# Altium PCB 显示板V1.0_ZM_20210706.PcbDoc
Units mm, origin at the board's own origin, x right, y up, seen from the top; angles counter-clockwise.
Board outline 12 x 48.5 mm, 2 copper layers (Top Layer, Bottom Layer); 22 components, 33 nets, 87 pads, 62 vias.
Unrouted connection lines stored in the file: 4.
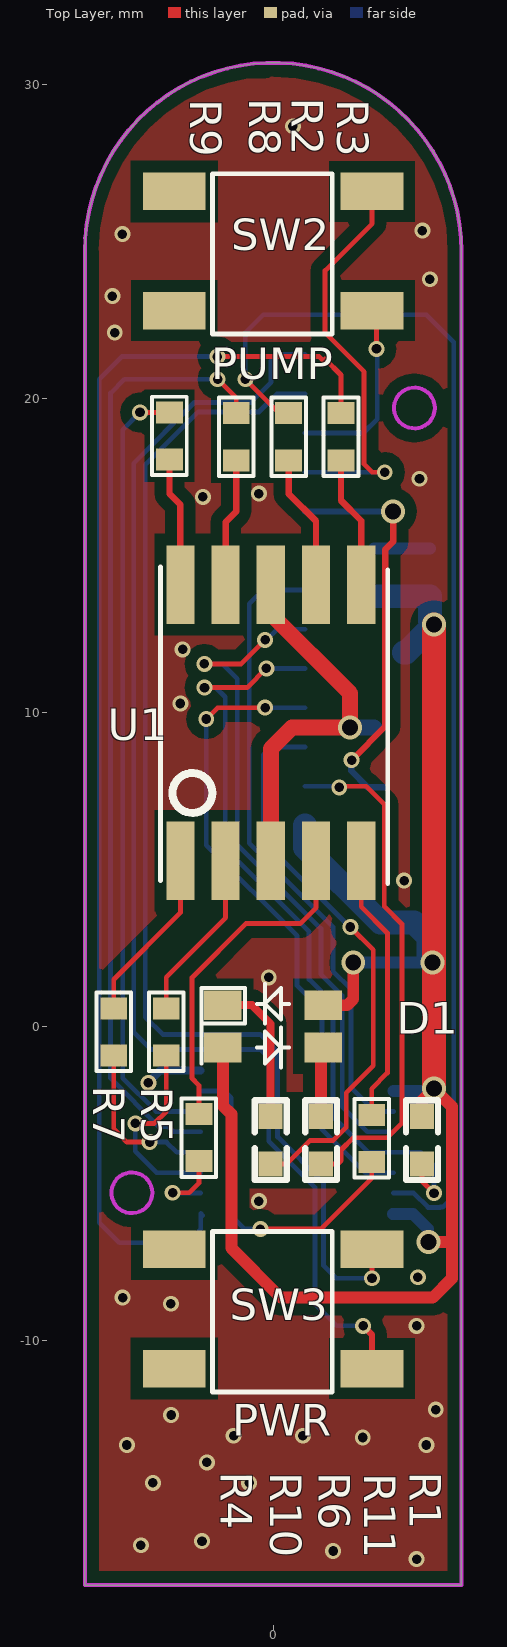
[diagram p0: Top Layer view]
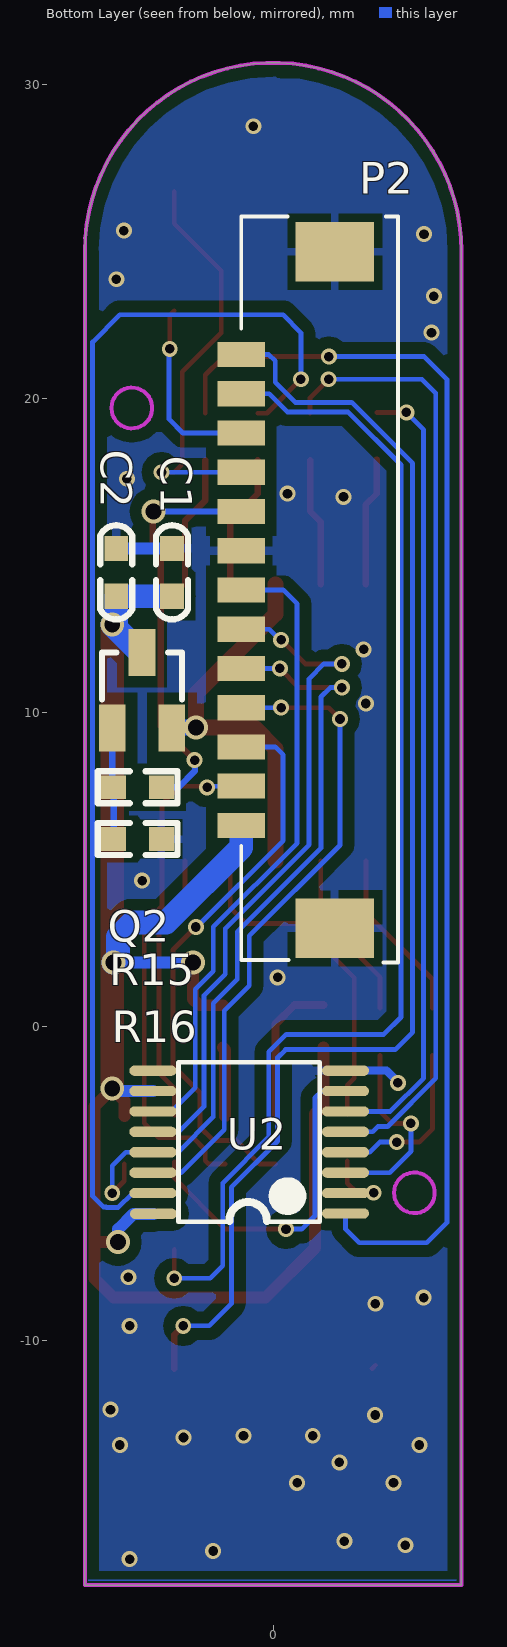
[diagram p1: Bottom Layer view, seen from below]
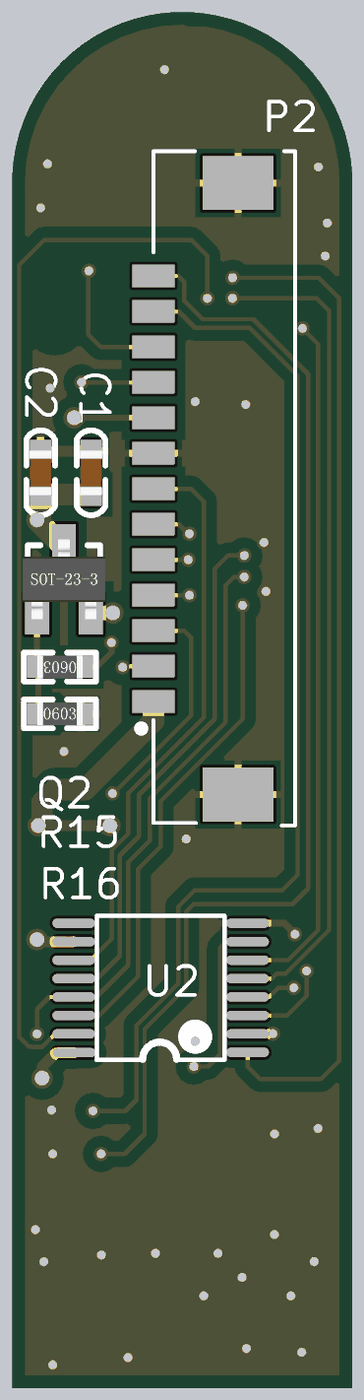
[diagram p2: 3D render of the assembled board from below, using the file's embedded part models]

## Layer stack, top to bottom
Top Solder: solder mask 0.0102, Solder Resist, Dk 3.5
Top Layer: signal copper 0.0356
Dielectric1: dielectric 0.32, FR-4, Dk 4.8
Bottom Layer: signal copper 0.0356
Bottom Solder: solder mask 0.0102, Solder Resist, Dk 3.5

## Board outline
-6,-17.8 -6,24.7 cw(c0,24.7) 6,24.7 6,-17.8

## Design rules (kind name [scope] priority, off if disabled: settings)
Clearance Clearance_1 [InPolygon] p1: gap=0.381
Clearance [All] p2: gap=0.127
MinimumSolderMaskSliver [All] p1: minsoldermaskwidth=0.127
PolygonConnect PolygonConnect_1 [IsVia] p1: connectstyle=Direct reliefconductorwidth=0.254 reliefentries=4 polygonreliefangle="90 Angle" airgapwidth=0.254
PolygonConnect [All] p2: connectstyle=Relief reliefconductorwidth=0.254 reliefentries=4 polygonreliefangle="90 Angle" airgapwidth=0.254
RoutingVias [All] p1: holewidth=0.711 width=1.27 viastyle="Through Hole" minholewidth=0.711 minwidth=1.27 maxholewidth=0.711 maxwidth=1.27
SilkToSolderMaskClearance [IsPad] p1: minsilkscreentomaskgap=0.025 clearancetoexposedcopper=TRUE
SolderMaskExpansion [All] p1: expansion=0.102
Width [All] p1: maxlimit=5.08 minlimit=0.152 preferedwidth=0.254
28 further rules are at their usual default settings.

## Components (designator, comment, footprint, x,y, rotation, side; value= is the part's Value field where it differs from the comment)
C1 "10uF 10V" SMD-0603C 3.22,14.465 r270 bottom
C2 "104 50V" SMD-0603C 4.998,14.465 r270 bottom
D1 "LED_RG" "LED-3528 -RG" 0,-0.675 r0 top locked
P2 "Header 13" 13×1.25mmSMT 1.016,6.403 r90 bottom locked
Q2 "S8050" SOT-23 4.175,10.712 r180 bottom
R1 "10K" SMD-0603 4.741,-3.624 r90 top
R2 "220" 0603R 0.491,19.533 r270 top
R3 "220" 0603R 2.161,19.533 r270 top
R4 "220" 0603R -2.363,-4.289 r90 top
R5 "220" 0603R -3.408,-0.921 r90 top
R6 "220R" SMD-0603 1.528,-3.624 r270 top
R7 "220" 0603R -5.08,-0.921 r90 top
R8 "220" 0603R -1.179,19.533 r270 top
R9 "220" 0603R -3.302,19.558 r270 top
R10 "220R" SMD-0603 -0.079,-3.624 r270 top
R11 "220" 0603R 3.14,-4.317 r90 top
R15 "1K" SMD-0603 4.318,7.62 r0 bottom
R16 "47K" SMD-0603 4.318,5.969 r180 bottom
SW2 "SW-BP" KEY_4X4 0,24.7 r180 top
SW3 "SW-BP" KEY_4X4 0,-9 r180 top
U1 "2011AY" 2011AY -2.954,5.277 r0 top locked
U2 "74HC595" SSOP-16 0.762,-3.683 r90 bottom

## Footprints (in the part's own frame and the unit in brackets; to place one, negate y for a bottom-side part, rotate by r counter-clockwise, add the part's x,y. Pads: shape width x height; smd on the part's side, far side on the other; paste and mask are expansions set on the pad)
13×1.25mmSMT [mm]
  rect 1.9x2.5 smd: 0(-3.275,-2.985) 0(18.275,-2.985)
  rect 0.8x1.5 smd: 1(0,0) 2(1.25,0) 3(2.5,0) 4(3.75,0) 5(5,0) 6(6.25,0) 7(7.5,0) 8(8.75,0) 9(10,0) 10(11.25,0) 11(12.5,0) 12(13.75,0) 13(15,0)
  round 0.5 on Bottom Overlay: ""(-0.95,0.432)
  silkscreen extent -4.37,-5 19.39,0
0603R [mm]
  rect 0.7x0.85 smd: 1(0,0) 2(1.5,0)
  silkscreen extent -0.5,-0.55 2,0.55
2011AY [mm]
  rect 0.9x2.5 smd: 1(0,0) 2(1.44,0) 3(2.88,0) 4(4.32,0) 5(5.76,0) 6(5.76,8.8) 7(4.32,8.8) 8(2.88,8.8) 9(1.44,8.8) 10(0,8.8)
  silkscreen extent -0.64,-0.73 6.6,9.37
KEY_4X4 [mm] "KEY_3X6"
  rect 2x1.2 smd: 1(-3.15,1.9) 1(3.15,1.9) 2(-3.15,-1.9) 2(3.15,-1.9)
  silkscreen extent -1.88,-2.46 1.93,2.64
"LED-3528 -RG" [mm] "贴片二极管"
  rect 1.2x0.95 smd: 1(-1.6,1.35) 2(-1.6,0) 3(1.6,0) 4(1.6,1.35)
  silkscreen extent -2.29,-0.64 0.51,2.03
SMD-0603 [mil] "W1/32贴片电阻"
  rect 31.5x30 smd: 1(-30,0) 2(30,0)
  silkscreen extent -50,-20 50,20, body extent -31,-16 31,16, height 18
SMD-0603C [mil] "贴片电容"
  rect 31.5x30 smd: 1(-30,0) 2(30,0)
  silkscreen extent -59,-20 59,20, body extent -31,-16 31,16
SOT-23 [mm]
  rect 0.85x1.5 smd: 1(-0.95,-1.2) 2(0.95,-1.2) 3(0,1.2)
  silkscreen extent -1.27,-0.3 1.28,1.2, body extent -1.45,-1.4 1.45,1.4, height 1.2
SSOP-16 [mm] "高密度SOP16"
  oval 0.33x1.5 smd: 1(-2.275,-3.069) 2(-1.625,-3.069) 3(-0.975,-3.069) 4(-0.325,-3.069) 5(0.325,-3.069) 6(0.975,-3.069) 7(1.625,-3.069) 8(2.275,-3.069) 9(2.275,3.069) 10(1.625,3.069) 11(0.975,3.069) 12(0.325,3.069) 13(-0.325,3.069) 14(-0.975,3.069) 15(-1.625,3.069) 16(-2.286,3.048)
  silkscreen extent -2.54,-2.25 2.54,2.26

## Part data
C1 C2: library part CAP4, "贴片电容 10%"
P2: "Header, 13-Pin"
Q2: library part NPN-1, "NPN"
R1 R6 R10 R15 R16: library part RES0, "贴片电阻 5%"
R2 R3 R4 R5 R7 R8 R9 R11: library part R, "R"
SW2 SW3: "3*6*3.5侧贴按键(编带)"
U2: "逻辑IC"

## Via types
v1: diameter 0.508, hole 0.305, Top Layer to Bottom Layer, tented both sides, 55 vias
v2: diameter 0.762, hole 0.508, Top Layer to Bottom Layer, tented both sides, 7 vias

## Nets (pads, with @x,y where several pads share a name; then routed paths per layer and width w, separated by ;. In a path a pad name is that pad's centre, name@x,y a point inside that pad or via, vN(x,y) a via of type N, cw(c..) or ccw(c..) an arc to the next point about the centre after c; other vN are vias at no path point)
CE: P2.6 U2.12 | length 21.8
  Top Layer w0.152: v1(-2.192,11.548) -1.021,11.548 v1(-0.254,12.315)
  Bottom Layer w0.152: v1(-2.192,11.548) -1.615,11.548 -1.143,11.076 -1.143,5.786 1.524,3.119 1.524,1.664 2.205,0.983 2.205,-2.561 3.002,-3.358 U2.12 ; v1@-0.213,12.315 0.125,12.653 P2.6
CLK: P2.7 U2.11 | length 20.4
  Bottom Layer w0.152: P2.7 -0.317,13.903 -0.762,13.458 -0.762,5.835 1.905,3.168 1.905,1.761 2.484,1.182 2.484,-1.955 3.237,-2.708 U2.11
DIA1: Q2.2 U1.3 U1.8 | length 12.8
  Top Layer w0.508: U1.3 -0.074,8.845 0.608,9.526 v2(2.454,9.526) 2.454,10.61 -0.074,13.138 U1.8
  Bottom Layer w0.508: v2(2.454,9.526) 3.211,9.526 Q2.2
GND: C1.1 C2.1 P2.0 P2.8 R16.2 U2.8 | length 3.6
  Bottom Layer w0.254: v1(-3.974,-1.795) -3.974,-1.775 -3.607,-1.408 U2.8
  Bottom Layer w0.381: C1.1 C2.1
  other v1: 4.571,-16.969 1.913,-16.711 -4.214,-16.527 -2.266,-16.395 -3.833,-14.54 -0.762,-14.54 -2.11,-13.887 -4.657,-13.334 4.884,-13.334 2.855,-13.094 -1.261,-13.038 0.945,-13.038 -3.252,-12.378 5.18,-12.208 4.571,-9.538 -3.259,-8.835 -4.792,-8.638 4.609,-7.99 -0.457,-5.568 -0.14,1.564 4.175,4.642 -2.954,10.286 -2.883,12.009 -2.241,16.868 -0.457,16.973 4.661,17.446 -5.045,22.102 -5.119,23.265 4.995,23.8 -4.805,25.24 4.755,25.351 0.627,28.674
LED_A: R2.2 U1.7 | length 4.3
  Top Layer w0.203: R2.2 0.491,16.973 1.366,16.099 U1.7
LED_B: R3.2 U1.6 | length 4.2
  Top Layer w0.203: R3.2 2.161,16.751 2.806,16.107 U1.6
LED_C: R4.2 U1.4 | length 10.8
  Top Layer w0.152: R4.2 -2.363,-1.875 -2.585,-1.654 -2.585,1.557 -0.867,3.275 0.863,3.275 1.366,3.777 U1.4
LED_D: R5.2 U1.2 | length 5.5
  Top Layer w0.152: R5.2 -3.408,1.566 -1.514,3.459 U1.2
LED_DIA1: P2.9 R15.1 | length 12.9
  Top Layer w0.203: v1(2.499,8.482) 3.576,9.559 3.576,15.194 3.831,15.449 v2@3.831,16.351
  Bottom Layer w0.203: P2.9 v2(3.814,16.403) ; v1@2.488,8.482 2.488,8.139 3.007,7.62 R15.1
  Bottom Layer w0.508: v2(3.814,16.403) v2@3.831,16.403
LED_E: R7.2 U1.1 | length 5.6
  Top Layer w0.152: R7.2 -5.08,1.495 -2.954,3.621 U1.1
LED_F: R8.2 U1.9 | length 4.1
  Top Layer w0.203: U1.9 -1.514,16.068 -1.179,16.403 R8.2
LED_G: R9.2 U1.10 | length 4.1
  Top Layer w0.203: R9.2 -3.302,16.973 -2.954,16.625 U1.10
LED_GREEN: P2.3 R10.2 | length 18
  Top Layer w0.152: R10.2 0.425,-4.386 1.178,-3.632 1.913,-3.632 2.33,-3.216 2.33,-2.116 3.19,-1.256 3.19,2.44 v1(2.463,3.167) v1@2.454,3.175
  Bottom Layer w0.152: P2.3 -0.064,8.903 -0.317,8.65 -0.317,5.918 2.433,3.167 v1(2.463,3.167)
LED_H: R11.2 U1.5 | length 8.6
  Top Layer w0.152: U1.5 2.806,3.81 3.64,2.976 3.64,-1.483 3.14,-1.983 R11.2
LED_RED: P2.2 R6.2 | length 16.5
  Top Layer w0.152: R6.2 2.056,-4.386 2.161,-4.281 2.161,-3.937 2.549,-3.549 3.64,-3.549 4.104,-3.085 4.104,3.262 3.543,3.824 3.543,7.07 2.96,7.653 v1@2.087,7.653
  Bottom Layer w0.152: P2.2 2.068,7.653 v1(2.106,7.616)
NetD1_1: D1.1 R10.1 | length 4.7
  Top Layer w0.254: D1.1 -0.675,0.675 -0.079,0.079 R10.1
NetD1_3: D1.3 R6.1 | length 2.2
  Top Layer w0.381: R6.1 1.528,-0.747 D1.3
NetP2_10: P2.10 SW2.2 | length 13.1
  Top Layer w0.152: SW2.2@3.15,26.6 3.15,25.574 1.653,24.077 1.653,22.09 2.895,20.848 2.895,17.908 3.15,17.653 v1(3.556,17.653)
  Bottom Layer w0.152: P2.10 v1(3.556,17.653)
NetP2_11: P2.11 SW2.1 | length 6.1
  Top Layer w0.152: SW2.1@3.15,22.8 3.293,22.657 v1(3.293,21.581)
  Bottom Layer w0.152: P2.11 2.876,18.903 3.314,19.341 v1@3.314,21.644
NetP2_12: P2.12 SW3.2 | length 38.3
  Top Layer w0.152: v1(3.15,-8.022) SW3.2@3.15,-7.1
  Bottom Layer w0.152: P2.12 0.125,20.153 -0.451,19.577 -2.383,19.577 -4.072,17.887 -4.072,0.298 -3.519,-0.256 -0.417,-0.256 0.141,-0.814 0.141,-3.522 1.608,-4.989 1.608,-7.625 2.006,-8.022 v1(3.15,-8.022)
NetP2_13: P2.13 SW3.1 | length 42
  Top Layer w0.152: SW3.1@-3.259,-10.791 SW3.1@-3.15,-10.9
  Top Layer w0.203: v1(2.864,-9.538) 3.15,-9.824 SW3.1@3.15,-10.9
  Bottom Layer w0.152: P2.13 0.141,21.403 -0.064,21.198 -0.064,20.523 -0.708,19.879 -2.505,19.879 -4.442,17.942 -4.442,-0.182 -3.888,-0.736 -0.397,-0.736 -0.138,-0.994 -0.138,-3.657 1.329,-5.125 1.329,-8.835 2.032,-9.538 v1(2.864,-9.538)
NetQ2_1: Q2.1 R15.2 R16.1 | length 3.6
  Bottom Layer w0.203: R16.1 R15.2 5.125,7.665 Q2.1
NetR2_1: R2.1 U2.15 | length 40
  Top Layer w0.152: v1(-0.886,20.615) 0.196,19.533 R2.1
  Bottom Layer w0.152: v1(-0.886,20.615) -0.886,22.1 -0.317,22.668 4.884,22.668 5.753,21.799 5.753,-5.404 5.402,-5.755 5.325,-5.755 5.314,-5.765 4.936,-5.765 4.478,-5.308 U2.15
NetR3_1: R3.1 U2.1 | length 40.6
  Top Layer w0.152: v1(-1.778,21.336) 1.469,21.336 1.599,21.206 1.653,21.26 2.161,20.751 R3.1
  Bottom Layer w0.152: U2.1@-2.24,-6.025 U2.1 -2.307,-6.456 -2.745,-6.893 -4.896,-6.893 -5.537,-6.253 -5.537,20.615 -4.816,21.336 v1(-1.778,21.336)
NetR4_1: R4.1 U2.2 | length 2.6
  Top Layer w0.152: v1(-3.201,-5.297) -2.671,-5.297 -2.363,-4.989 R4.1
  Bottom Layer w0.152: v1@-3.201,-5.308 U2.2
NetR5_1: R5.1 U2.3 | length 6.2
  Top Layer w0.152: v1(-4.389,-3.091) -3.785,-3.091 -3.408,-2.713 R5.1
  Bottom Layer w0.152: v1(-4.389,-3.091) -4.394,-3.096 -4.394,-3.975 -3.712,-4.658 U2.3
NetR7_1: R7.1 U2.4 | length 5.4
  Top Layer w0.152: R7.1 -5.08,-3.26 -4.657,-3.683 v1(-3.937,-3.683)
  Bottom Layer w0.152: v1(-3.937,-3.683) -3.398,-3.683 -3.073,-4.008 U2.4
NetR8_1: R8.1 U2.5 | length 30.3
  Top Layer w0.152: v1(-1.77,20.615) -1.179,20.024 R8.1
  Bottom Layer w0.152: U2.5 -3.169,-3.358 -3.337,-3.19 -3.643,-3.19 -5.18,-1.654 -5.18,20.176 -4.74,20.615 v1(-1.77,20.615)
NetR9_1: R9.1 U2.6 | length 25.3
  Top Layer w0.152: v1(-4.241,19.558) R9.1
  Bottom Layer w0.152: v1(-4.241,19.558) -4.792,19.007 -4.792,-1.646 -3.73,-2.708 U2.6
NetR11_1: R11.1 U2.7 | length 10.7
  Top Layer w0.152: v1(-0.409,-6.456) 1.52,-6.456 3.14,-4.836 R11.1
  Bottom Layer w0.152: U2.7 -1.547,-2.058 -1.333,-2.271 -1.333,-6.032 -0.91,-6.456 v1(-0.409,-6.456)
OE: P2.5 R1.1 U2.13 | length 24.9
  Top Layer w0.152: v1(-2.188,10.793) -0.822,10.793 v1(-0.213,11.403) ; R1.1 4.741,-4.924 v1(5.125,-5.308)
  Bottom Layer w0.152: v1(-2.188,10.793) -1.824,10.793 -1.524,10.494 -1.524,5.679 1.143,3.012 1.143,1.496 1.907,0.732 1.907,-2.885 3.03,-4.008 U2.13 4.694,-4.008 5.125,-4.439 v1(5.125,-5.308) ; v1@-0.254,11.403 v1(-0.213,11.403) P2.5
SQH: P2.4 U2.14 | length 20.7
  Top Layer w0.152: v1(-2.13,9.793) -1.77,10.153 v1(-0.254,10.153)
  Bottom Layer w0.152: v1(-2.13,9.793) -2.13,5.776 0.762,2.884 0.762,1.299 1.56,0.501 1.56,-3.286 2.933,-4.658 U2.14 ; v1@-0.213,10.153 P2.4
VIN: C1.2 C2.2 D1.2 D1.4 P2.1 Q2.3 R1.2 U2.10 U2.16 | length 55.8
  Top Layer w0.381: D1.2 -1.6,-2.523 -1.333,-2.789 -1.333,-7.058 0.247,-8.638 5.082,-8.638 5.697,-8.024 5.697,-6.893 ; D1.4 2.358,0.675 2.552,0.869 v2(2.552,2.033) ; R1.2 4.741,-2.367 v2(5.125,-1.983) 5.697,-2.555 5.697,-6.893 ; v2(4.947,-6.865) 5.668,-6.865 5.697,-6.893
  Top Layer w0.762: v2(5.125,-1.983) v2(5.125,12.804)
  Bottom Layer w0.381: v2(2.552,2.033) 5.077,2.033 v2(5.08,2.035) ; U2.16 4.449,-5.969 4.936,-6.456 v2@4.936,-6.893 ; U2.10 5.05,-2.058 v2(5.125,-1.983)
  Bottom Layer w0.762: P2.1 1.016,5.704 3.414,3.306 4.485,3.306 4.947,2.844 4.947,2.168 v2(5.08,2.035) ; C1.2 C2.2 4.998,12.931 v2(5.125,12.804) 4.233,11.912 Q2.3
pads on no net: P2. U2.9

## Polygon pours and split planes (outlines as drawn)
GND on Bottom Layer "Top Layer-No Net" (solid, remove dead copper, pour order 0): -5.825,-17.646 5.893,-17.646
GND on Bottom Layer "Top Layer-No Net" (solid, remove dead copper, pour order 1): -10.583,31.624 6.729,31.624 6.939,31.834 8.481,30.292 8.481,-17.999 -10.163,-17.999 -10.093,-17.929 -10.093,32.044
GND on Top Layer "Top Layer-No Net" (solid, remove dead copper, pour order 3): -8.926,32.189 -7.883,31.146 10.653,31.146 10.653,-17.279 8.278,-19.654 7.583,-18.959 -3.017,-18.959 -6.551,-18.959 -8.52,-16.989 -8.578,-16.931 -8.578,-14.672 -8.578,30.277 -7.478,31.378

## Keep-outs
Keep-Out Layer:
  circle w0.127: c4.5,19.7 r0.65
  circle w0.127: c4.5,19.7 r0.65
  circle w0.127: c-4.5,-5.3 r0.65
  lines w0.127: -6,-17.8 6,-17.8 6,24.7 ccw(c0,24.7) -6,24.7 -6,-17.8

## Silkscreen, mask and mechanical layers (free items; w line width, h text height)
Top Overlay:
  text "PUMP" at -1.969,20.615 h1.02
  text "PWR" at -1.303,-13.038 h1.02
Mechanical 1:
  circle w0.127: c4.5,19.7 r0.65
  circle w0.127: c-4.5,-5.3 r0.65
  lines w0.127: -6,-17.8 -6,24.7 cw(c0,24.7) 6,24.7 6,-17.8 -6,-17.8
Mechanical 2:
  circle w0.127: c2.458,6.503 r0.425
  circle w0.127: c0,0 r1
  circle w0.127: c0,24.7 r1
  circle w0.127: c0,-9 r1
  lines w0.127: -3.308,4.102 -3.45,4.102 -3.45,5 ; -3.308,5 -3.308,4.055 -3.143,4.055 cw(c-2.836,4.055) -2.528,4.055 -2.363,4.055 -2.363,5 ; -3.308,14.452 -3.308,15.397 -3.143,15.397 ccw(c-2.836,15.397) -2.528,15.397 -2.363,15.397 -2.363,14.452 ; -3.308,15.35 -3.45,15.35 -3.45,14.452 ; -2.363,4.102 -1.89,4.102 ; -2.363,15.35 -1.89,15.35 ; -1.89,5 -1.89,4.055 -1.725,4.055 cw(c-1.418,4.055) -1.111,4.055 -0.945,4.055 -0.945,5 ; -1.89,14.452 -1.89,15.397 -1.725,15.397 ccw(c-1.418,15.397) -1.111,15.397 -0.945,15.397 -0.945,14.452 ; -0.945,4.102 -0.473,4.102 ; -0.945,15.35 -0.473,15.35 ; -0.707,-0.707 0.707,0.707 ; -0.707,0.707 0.707,-0.707 ; -0.473,5 -0.473,4.055 -0.307,4.055 cw(c0,4.055) 0.307,4.055 0.473,4.055 0.473,5 ; -0.473,14.452 -0.473,15.397 -0.307,15.397 ccw(c0,15.397) 0.307,15.397 0.473,15.397 0.473,14.452 ; 0.473,4.102 0.945,4.102 ; 0.473,15.35 0.945,15.35 ; 0.945,5 0.945,4.055 1.111,4.055 cw(c1.418,4.055) 1.725,4.055 1.89,4.055 1.89,5 ; 0.945,14.452 0.945,15.397 1.111,15.397 ccw(c1.418,15.397) 1.725,15.397 1.89,15.397 1.89,14.452 ; 1.89,4.102 2.363,4.102 ; 1.89,15.35 2.363,15.35 ; 2.363,5 2.363,4.055 2.528,4.055 cw(c2.836,4.055) 3.143,4.055 3.308,4.055 3.308,5 ; 2.363,14.452 2.363,15.397 2.528,15.397 ccw(c2.836,15.397) 3.143,15.397 3.308,15.397 3.308,14.452 ; 3.308,4.102 3.45,4.102 3.45,5 ; 3.308,15.35 3.45,15.35 3.45,14.452 ; -3.45,5 -3.45,14.452 ; -3.45,5 3.45,5 ; -3.45,14.452 3.45,14.452 ; 3.45,5 3.45,14.452 ; -2.578,6.59 -2.474,6.466 -1.721,7.098 -1.356,9.166 -1.659,9.526 -2.13,9.131 -2.578,6.59 ; -2.292,6.249 -1.538,6.881 0.571,6.881 1.086,6.266 0.918,6.125 -2.188,6.125 -2.292,6.249 ; -1.926,10.286 -1.472,12.862 -1.303,13.003 -0.788,12.389 -1.152,10.321 -1.624,9.926 -1.926,10.286 ; -1.441,9.709 -0.97,10.104 1.139,10.104 1.441,9.744 0.97,9.348 -1.139,9.348 -1.441,9.709 ; -1.086,13.186 -0.918,13.327 2.188,13.327 2.292,13.203 1.538,12.571 -0.571,12.571 -1.086,13.186 ; 0.788,7.063 1.152,9.131 1.624,9.526 1.926,9.166 1.472,6.59 1.304,6.449 0.788,7.063 ; 1.356,10.286 1.721,12.354 2.474,12.986 2.578,12.862 2.13,10.321 1.659,9.926 1.356,10.286
Mechanical 3:
  circle w0.127: c0,24.7 r4
  circle w0.127: c0,-9 r4
  lines w0.127: -0.11,-5.002 cw(c0,-9) 0,-5 ; -0.11,28.698 cw(c0,24.7) 0,28.7

## Dimensions
-6,-17.8 to 0,30.7 on Multi-Layer
-6,-17.8 to 6,-17.8 on Multi-Layer

## Text inside footprints (layer, text, board x,y; h text height)
SW2: Mechanical 7 "2" at -3.576,24.705 h0.25 r180; Mechanical 7 "1" at 3.424,24.705 h0.25 r180
SW3: Mechanical 7 "2" at -3.576,-8.995 h0.25 r180; Mechanical 7 "1" at 3.424,-8.995 h0.25 r180